# Altium PCB vreg.PcbDoc
Units mil, origin at the board's own origin, x right, y up, seen from the top; angles counter-clockwise.
Board outline 2500 x 1000 mil, 2 copper layers (Top Layer, Bottom Layer); 15 components, 8 nets, 39 pads, 0 vias.
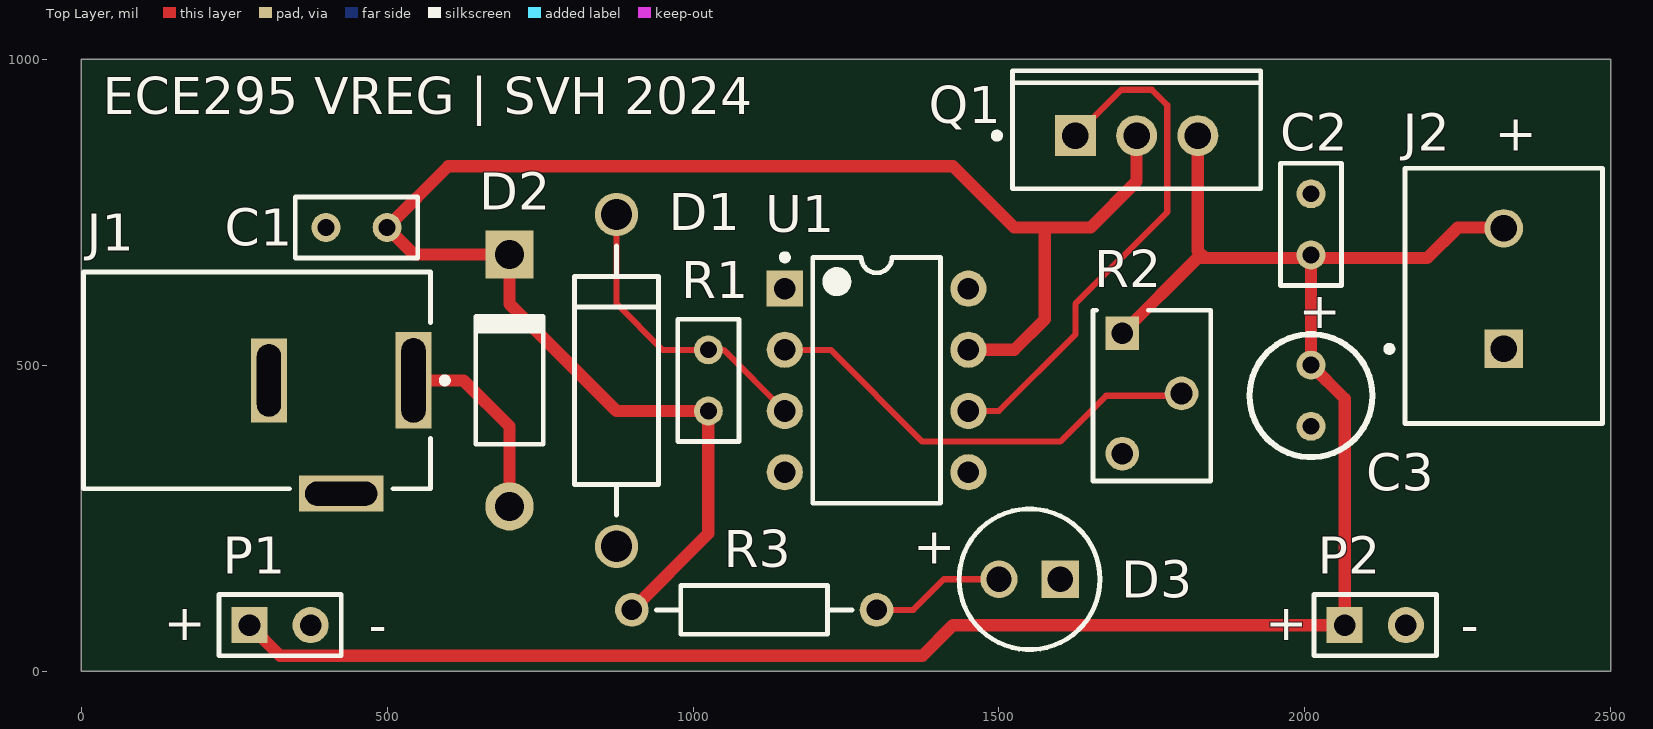
[diagram p0: Top Layer view]
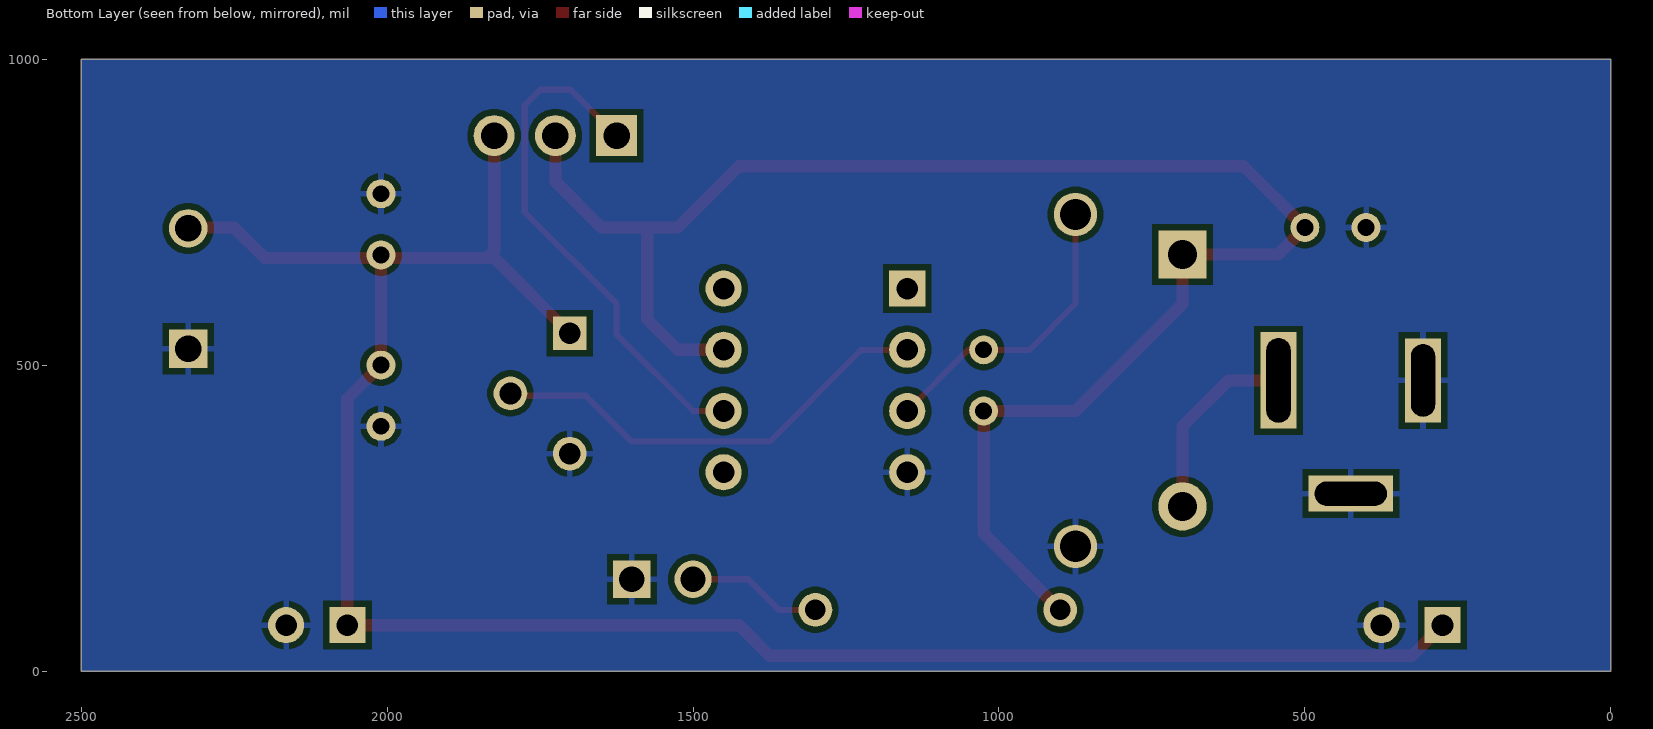
[diagram p1: Bottom Layer view, seen from below]

## Layer stack, top to bottom
Top Solder: solder mask 0.4, Solder Resist, Dk 3.5
Top Layer: signal copper 1.4
Dielectric 1: dielectric 12.6, FR-4, Dk 4.8
Bottom Layer: signal copper 1.4
Bottom Solder: solder mask 0.4, Solder Resist, Dk 3.5

## Board outline
0,0 2500,0 2500,1000 0,1000

## Design rules (kind name [scope] priority, off if disabled: settings)
Clearance [All] p1: gap=10 ignorepadtopadclearanceinfootprint=FALSE except(0: Arc-Hole Track-Hole SMDPad-Hole THPad-Hole Via-Hole Fill-Hole Poly-Hole Region-Hole Text-Hole)
PolygonConnect [All] p1: connectstyle=Relief reliefconductorwidth=10 reliefentries=4 polygonreliefangle="90 Angle" airgapwidth=10
RoutingVias [All] p1: holewidth=28 width=50 viastyle="Through Hole" minholewidth=28 minwidth=50 maxholewidth=28 maxwidth=50
SolderMaskExpansion [All] p1: expansion=4 istentingtop=FALSE
Width Width_1 [(InNet('GND') OR InNet('VIN') OR InNet('VOUT') or InNet('NetC1_1'))] p1: maxlimit=30 minlimit=20 preferedwidth=20
Width [All] p2: maxlimit=10 minlimit=10 preferedwidth=10
30 further rules are at their usual default settings.

## Components (designator, comment, footprint, x,y, rotation, side; value= is the part's Value field where it differs from the comment)
C1 "Cap" RAD-0.1 450,725 r180 top value=100nF
C2 "Cap" RAD-0.1 2010,730 r90 top value=100nF
C3 "Cap Pol1" RAD-0.1 2010,450 r270 top value=10uF
D1 "1N5222" ONSC-SURMETIC40-2-017AA-01 875,475 r270 top
D2 "1N4001" DO-41 700,475 r90 top
D3 "HLMP-3301" AVAG-HLMP-3301-2 1600,150 r180 top
J1 "PJ-002A" CUI-PJ-002A_V 425,475 r180 top
J2 "282836-2" TECO-282836-2_V 2325,625 r90 top
P1 "VOUT" HDR1X2 275,75 r0 top
P2 "VOUT" HDR1X2 2065,75 r0 top
Q1 "TIP29CG" ONSC-TO-220-3-221A-09 1725,875 r90 top
R1 "Res1" RAD-0.1 1025,475 r270 top value=330
R2 "10k" FP-PV37W103C01B00-MFG 1750,450 r270 top
R3 "Res1" AXIAL-0.4 1100,100 r180 top value=1k
U1 "LM741CN/NOPB" P0008A 1300,475 r0 top

## Footprints (in the part's own frame and the unit in brackets; to place one, negate y for a bottom-side part, rotate by r counter-clockwise, add the part's x,y. Pads: shape width x height; smd on the part's side, far side on the other; paste and mask are expansions set on the pad)
AVAG-HLMP-3301-2 [mm] "THD, 2-Leads, Body Dia 5.85mm"
  rect 1.55x1.55 hole 1.05: 1(0,0)
  round 1.55 hole 1.05: 2(2.54,0)
  silkscreen extent -1.65,-2.92 4.19,2.92
AXIAL-0.4 [mm] "Axial Device, Thru-Hole; 2 Leads; 0.4 in Pin Spacing"
  round 1.4 hole 0.85: 1(-5.08,0) 2(5.08,0)
  silkscreen extent -4.06,-1.02 4.06,1.02
CUI-PJ-002A_V [mm] "THD, 3-Leads, Body 14.4x9mm, Height 11mm"
  rect 1.5x4 hole 1 slot 3.5 at 90 deg: 1(-3,0)
  rect 1.5x3.5 hole 1 slot 3 at 90 deg: 2(3,0)
  rect 3.5x1.5 hole 1 slot 3 at 0 deg: 3(0,4.7)
  silkscreen extent -4.43,-4.5 10.7,4.5, body extent -3.7,-4.5 10.7,4.9, height 11
DO-41 [mm] "Diode, Axial; Body 5.2 x 2.7 mm (LxDia. max), Lead Dia. 0.86 mm (max)"
  round 2 hole 1.2: 1(-5.23,0)
  rect 2x2 hole 1.2: 2(5.23,0)
  silkscreen extent -2.65,-1.4 2.75,1.4
FP-PV37W103C01B00-MFG [mm]
  rect 1.4x1.4 hole 0.9 paste-1000 mask+0: 1(-2.595,-1.23)
  round 1.4 hole 0.9 paste-1000 mask+0: 2(-0.095,1.23) 3(2.405,-1.23)
  silkscreen extent -3.54,-2.44 3.54,2.44, body extent -3.64,-2.54 3.64,2.54, height 0.25
HDR1X2 [mm] "Connector; Header; 2 Position"
  rect 1.5x1.5 hole 0.9: 1(0,0)
  round 1.5 hole 0.9: 2(2.54,0)
  silkscreen extent -1.27,-1.27 3.81,1.27
ONSC-SURMETIC40-2-017AA-01 [mm] "AXIAL, 2-Leads, Diameter 3.49mm"
  round 1.8 hole 1.3: 1(-6.887,0) 2(6.887,0)
  silkscreen extent -5.59,-1.75 5.59,1.75
ONSC-TO-220-3-221A-09 [mm] "FM, 3-Leads, Body 10.3x4.85mm, Pitch 2.54mm"
  rect 1.7x1.7 hole 1.1: 1(0,2.54)
  round 1.7 hole 1.1: 2(0,0) 3(0,-2.54)
  silkscreen extent -2.2,-5.15 2.7,5.92, body extent -2.18,-5.15 2.67,5.15, height 19.85
P0008A [mm] "DIP, 8-Leads, Body 10.15x6.6mm, Pitch 2.54mm"
  rect 1.5x1.5 hole 0.9: 1(-3.81,3.81)
  round 1.5 hole 0.9: 2(-3.81,1.27) 3(-3.81,-1.27) 4(-3.81,-3.81) 5(3.81,-3.81) 6(3.81,-1.27) 7(3.81,1.27) 8(3.81,3.81)
  silkscreen extent -3.93,-5.1 2.65,5.23, body extent -3.95,-5.07 3.95,5.07, height 5.08
RAD-0.1 [mm] "Radial Cap, Thru-Hole; 2 Leads; 0.1 in Pin Spacing"
  round 1.2 hole 0.7: 1(-1.27,0) 2(1.27,0)
  silkscreen extent -2.54,-1.27 2.54,1.27
TECO-282836-2_V [mm] "Female Header, Pitch 5mm, 1 x 2 Position, Height 10mm"
  rect 1.6x1.6 hole 1.1: 1(-2.5,0)
  round 1.6 hole 1.1: 2(2.5,0)
  silkscreen extent -5.6,-4.1 5,4.87, body extent -5.6,-4.1 5,4.1, height 10

## Part data
C1 C2: "Capacitor", PartNumber=399-4151-ND, LatestRevisionDate=17-Jul-2002, LatestRevisionNote="Re-released for DXP Platform.", PackageDescription="Radial Cap, Thru-Hole; 2 Leads; 0.3 in Pin Spacing", PackageReference=RAD-0.3, Published=8-Jun-2000, Publisher="Altium Limited"
C3: "Polarized Capacitor (Radial)", LatestRevisionDate=17-Jul-2002, LatestRevisionNote="Re-released for DXP Platform.", PackageDescription="Polarized Capacitor (Radial); 2 Leads", PackageReference=RB7.6-15, Published=8-Jun-2000, Publisher="Altium Limited"
D1: library part CMP-1060-01319-1, "5 W Zener Voltage Regulator, 2-Pin Surmetic(TM) 40, Pb-Free, Tape and Reel", Manufacturer="On Semiconductor", PartNumber=1N5222B-ND, ComponentLink1Description="Manufacturer URL", ComponentLink1URL=http://www.onsemi.com/, ComponentLink2Description=Datasheet, ComponentLink2URL=http://www.onsemi.cn/pub_link/Collateral/1N5333B-D.PDF, ComponentLink3Description="Package Specification", ComponentLink3URL=http://www.onsemi.cn/pub_link/Collateral/017AA.PDF, DatasheetVersion="Rev. 14", Mounting Technology="Through Hole", P Max (W)=5, PackageDescription="2-Pin, Axial Lead, Diameter 3.49 mm", PackageReference=SURMETIC40-2-017AA-01, PackageVersion="Rev. O, 09/2005", Packing="Tape and Reel", RoHS=Pb-Free, VZ Typ (V)=160
D2: library part "Diode 1N4001", "1 Amp General Purpose Rectifier", PartNumber=S1011EC-04-ND, Code_JEDEC=DO-204-AL, ComponentLink1Description="Manufacturer Link", ComponentLink1URL=http://www.fairchildsemi.com/, ComponentLink2Description=Datasheet, ComponentLink2URL=http://www.fairchildsemi.com/ds/1N%2F1N4001.pdf, DatasheetVersion=1998, LatestRevisionDate=17-Jul-2002, LatestRevisionNote="Re-released for DXP Platform.", PackageDescription="Diode, Axial; Body 5.2 x 2.7 mm (LxDia. max), Lead Dia. 0.86 mm (max)", PackageReference=DO-41, PackageVersion=Aug-1999, Published=8-Jun-2000, Publisher="Altium Limited"
D3: library part CMP-2000-06411-1, "T-1 3/4 (5 mm) Diffused LED Lamp, 1.9 V, -40 to 100 degC, 2-Pin THD, RoHS, Bulk", Emitting color=Red, Forward Current=25mA, Forward Voltage=2.4V, Manufacturer=Avago, Operating Temp Range=-40Cto100C, Operating Temperature Classification=Industrial, Package Description="2-Pin Through Hole LED, Dia 5.85 mm", Package Type=T-13/4, PartNumber=1497-XCMDK12D-ND, Power Dissipation=85W, Reverse Voltage=5V, Test Current (It)=10mA, Chip Material=GaP, Datasheet URL=http://www.avagotech.com/docs/AV02-1558EN, Datasheet Version=03/2015, DELETED=Compliant, Dominant Wave Length=626nm, High Brightness=No, Lens Dimensions=5.08x5.08x8.3mm, Lens Type=ColoredDiffused, Lum Intensity=5.4mcd, Luminous Intensity=5.4mcd, Main Category=StandardLED, Manufacturer URL=http://www.avagotech.com/, Mounting=ThroughHole, Mounting Technology=ThroughHole, Number of  Elements=1, Package Reference=HLMP-3301, Packaging=TapeandReel, Peak Wavelength=635nm, Pin Count=2, Product Depth (mm)=6.1mm, Product Height (mm)=9.19mm, Product Length (mm)=6.1mm, Rad Hardened=No, Shape Type=Circular, Type=Uni-Color, Viewing Angle=60deg
J1: library part CMP-2000-06895-1, "Through Hole Right Angle DC Power Jack, 2.5 A, 2 mm Center Pin, 3 Position, -25 to 85 degC, RoHS, Bulk", Current Rating=2.5A, Flammability Rating=UL94V-0, Insulation Resistance=50MOhms, Manufacturer=CUIInc., Operating Temperature Range=-25Cto+85C, Package Description="3-Pin Through Hole Device, Body 14.4 x 9 mm, Height 11 mm", PartNumber=CP-002A-ND, Voltage Rating=24V, Brand=CUI, Connector Type=DCPowerJack, Contact Gender=Male, Contact Material=Copper, Contact Plating=Nickel, Datasheet URL=http://www.cui.com/product/resource/pj-002a.pdf, Datasheet Version="Rev. 1.03, 04/2016", Factory Pack Quantity=500, Housing Material=PolybutyleneTerephthalate(PBT), Inside Contact Diameter=2mm, Manufacturer URL=http://www.cui.com/, Mounting Angle=Right, Mounting Style=ThroughHole, Mounting Technology=ThroughHole, Outside Contact Diameter=6.5mm, Package Reference=PJ-002A, Product=Jacks, Product Category=DCPowerConnectors, RoHS=True, Termination Style=ThroughHole
J2: library part CMP-1684-00017-1, "Female Header, Pitch 5 mm, 1 x 2 Position, Height 10 mm, Tail Length 3.5 mm, Rohs, Bulk", Color=Green, Current=13.5A, Manufacturer="TE Connectivity", Package Description="Female Header, Pitch 5 mm, 1 x 2 Position, Height 10 mm, Tail Length 3.5 mm", Package Reference=THD, PartNumber=A98076-ND, Standard Package=300, Voltage=300V, 3D Model=282836-2.pdf, Category=Connectors,Interconnects, Clamp Material - Plating=Brass-NickelPlated, Contact Material - Plating=Brass-TinPlated, Datasheet URL=http://www.te.com.cn/commerce/DocumentDelivery/DDEController?Action=showdoc&DocId=Catalog+Section%7F1308389_EUROSTYLE_TERMINAL_BLOCKS%7F0607%7Fpdf%7FEnglish%7FENG_CS_1308389_EUROSTYLE_TERMINAL_BLOCKS_0607.pdf%7F282836-2, Dynamic Catalog=BuchananSeries, Family=TerminalBlocks-WiretoBoard, Featured Product=EurostyleTerminalBlockConnectors, Features=Interlocking(Side), Housing Material=Polyamide(PA66),Nylon6/6, Manufacturer URL=http://www.te.com, Mating Orientation=HorizontalwithBoard, Mounting Type=ThroughHole, Number of Levels=1, Other Names="5ULV-02B / A98076", Packaging=Bulk, Pitch="0.197\"(5.00mm)", Positions Per Level=2, Product Training Modules=Wire-to-BoardEurostyleTerminalBlocks, RoHS Information=282836-2StatementofCompliance, Screw Material - Plating=Brass-NickelPlated, Screw Thread=M3, Series=Buchanan, Torque - Screw=0.68Nm(6Lb-In), Wire Gauge=16-30AWG, Wire Termination=Screw-RisingCageClamp
P1 P2: library part "Header 2", "Header, 2-Pin", PartNumber=S1011EC-04-ND, LatestRevisionDate=17-Jul-2002, LatestRevisionNote="Re-released for DXP Platform.", Publisher="Altium Limited"
Q1: library part CMP-1048-01094-1, "Complementary Silicon Plastic Power Transistor, 3-Pin TO-220, Pb-Free, Tube", Manufacturer="On Semiconductor", PartNumber=TIP29CGOS-ND, ComponentLink1Description="Manufacturer URL", ComponentLink1URL=http://www.onsemi.com/, ComponentLink2Description=Datasheet, ComponentLink2URL=http://www.onsemi.com/pub_link/Collateral/TIP29B-D.PDF, ComponentLink3Description="Package Specification", ComponentLink3URL=http://www.onsemi.com/pub_link/Collateral/221A-09.PDF, DatasheetVersion="Rev. 12", fT Min (MHz)=3, IC Continuous (A)=1, Mounting Technology="Through Hole", PackageDescription="3-Pin Flange Mount, Vertical Straight Lead, Body 9.97 x 4.445 mm, Pitch 2.54 mm", PackageReference=TO-220-3-221A-09, PackageVersion="Rev. AG, 09/2011", Packing=Tube, Polarity=NPN, RoHS=TRUE
R1: "Resistor", PartNumber=330QBK-ND, LatestRevisionDate=17-Jul-2002, LatestRevisionNote="Re-released for DXP Platform.", PackageDescription="Axial Device, Thru-Hole; 2 Leads; 0.3 in Pin Spacing", PackageReference=AXIAL-0.3, Published=8-Jun-2000, Publisher="Altium Limited"
R2: library part CMP-07234-000029-1, "TRIMMER 10K OHM 0.25W PC PIN TOP PV37W103C01B00", Max Power Dissipation=250mW, PartNumber=490-2970-ND, Resistance=10kR, Resistor Type=Cermet, Temperature Coefficient=150ppm/°C, Tolerance=10%, Height=0.264inch, Mount="Through Hole", Number of Turns=12, Packaging=Bulk, RoHS Compliant=No, Termination="PC Pins"
R3: "Resistor", PartNumber=CF14JT1K00CT-ND, LatestRevisionDate=17-Jul-2002, LatestRevisionNote="Re-released for DXP Platform.", PackageDescription="Axial Device, Thru-Hole; 2 Leads; 0.3 in Pin Spacing", PackageReference=AXIAL-0.3, Published=8-Jun-2000, Publisher="Altium Limited"
U1: library part CMP-0055-00162-3, "Operational Amplifier, 8-pin MDIP, Pb-Free", Manufacturer="Texas Instruments", Package Reference=P0008A, PackageTopMarking=NSUZXYTTE#*LM*741CN, PartNumber=LM741CNNS/NOPB-ND, PowerWise=N, Code_JEDEC=MS-001-BA, ComponentLink1Description="Datasheet URL", ComponentLink1URL=http://www.ti.com/general/docs/lit/getliterature.tsp?genericPartNumber=LM741&fileType=pdf, CompType=Amplifiers, PackageDescription="MDIP, .365 x .250 x .130in, 8 Lead, .100in Pitch", PinCount=8, RoHS=Y

## Nets (pads, with @x,y where several pads share a name; then routed paths per layer and width w, separated by ;. In a path a pad name is that pad's centre, name@x,y a point inside that pad or via, vN(x,y) a via of type N, cw(c..) or ccw(c..) an arc to the next point about the centre after c; other vN are vias at no path point)
GND: C1.2 C2.2 C3.2 D1.2 D3.1 J1.2 J1.3 J2.1 P1.2 P2.2 R2.3 U1.4
NetC1_1: C1.1 D2.2 Q1.2 R1.2 R3.2 U1.7 | length 2783.1
  Top Layer w20: R3.2 1025,225 R1.2 875,425 700,600 D2.2 544.09,680.91 C1.1 600,825 1425,825 1525,725 1575,725 ; U1.7 1525,525 1575,575 1575,725 ; Q1.2 1725,800 1650,725 1575,725
NetD1_1: D1.1 R1.1 U1.3 | length 493.6
  Top Layer w10: D1.1 875,600 950,525 R1.1 1050,525 U1.3
NetD3_2: D3.2 R3.1 | length 220.7
  Top Layer w10: R3.1 1360,100 1410,150 D3.2
NetQ1_1: Q1.1 U1.6 | length 855.3
  Top Layer w10: U1.6 1500,425 1625,550 1625,600 1775,750 1775,925 1750,950 1700,950 Q1.1
NetR2_2: R2.2 U1.2 | length 743.2
  Top Layer w10: U1.2 1225,525 1375,375 1600,375 1675,450 1794.68,450 R2.2
VIN: D2.1 J1.1 | length 318.9
  Top Layer w20: J1.1 625,475 700,400 D2.1
VOUT: C2.1 C3.1 J2.2 P1.1 P2.1 Q1.3 R2.1 | length 3356.8
  Top Layer w20: P1.1 325,25 1375,25 1425,75 P2.1 2065,445 C3.1 2010,670 C2.1@2015,675 ; R2.1 1824.41,675 1836.72,675 ; Q1.3 1825,686.72 1836.72,675 ; J2.2 2323.43,725 2250,725 2200,675 2075,675 C2.1@2015,675 ; 1836.72,675 C2.1@2015,675
pads on no net: U1.1 U1.5 U1.8

## Polygon pours and split planes (outlines as drawn)
GND on Bottom Layer "GND_L02_P000" (solid, pour order 0): 0,1000 2500,1000 2500,0 0,0

## Silkscreen, mask and mechanical layers (free items; w line width, h text height)
Top Overlay:
  circle w10: c2010,450 r100.5
  text "ECE295 VREG | SVH 2024" at 35,910 h60
  text "+" at 2310,850 h60
  text "+" at 1990,560 h60
  text "+" at 1360,175 h60
  text "+" at 135,50 h60
  text "+" at 1935,50 h60
  text "-" at 470,45.01 h60
  text "-" at 2255,45.01 h60
Mechanical 13:
  the board outline again, w19.68